# Altium PCB main.PcbDoc
Units mm, origin at the board's own origin, x right, y up, seen from the top; angles counter-clockwise.
Board outline 160 x 105 mm, 2 copper layers (Top Layer, Bottom Layer); 115 components, 173 nets, 627 pads, 0 vias.
Unrouted connection lines stored in the file: 332.
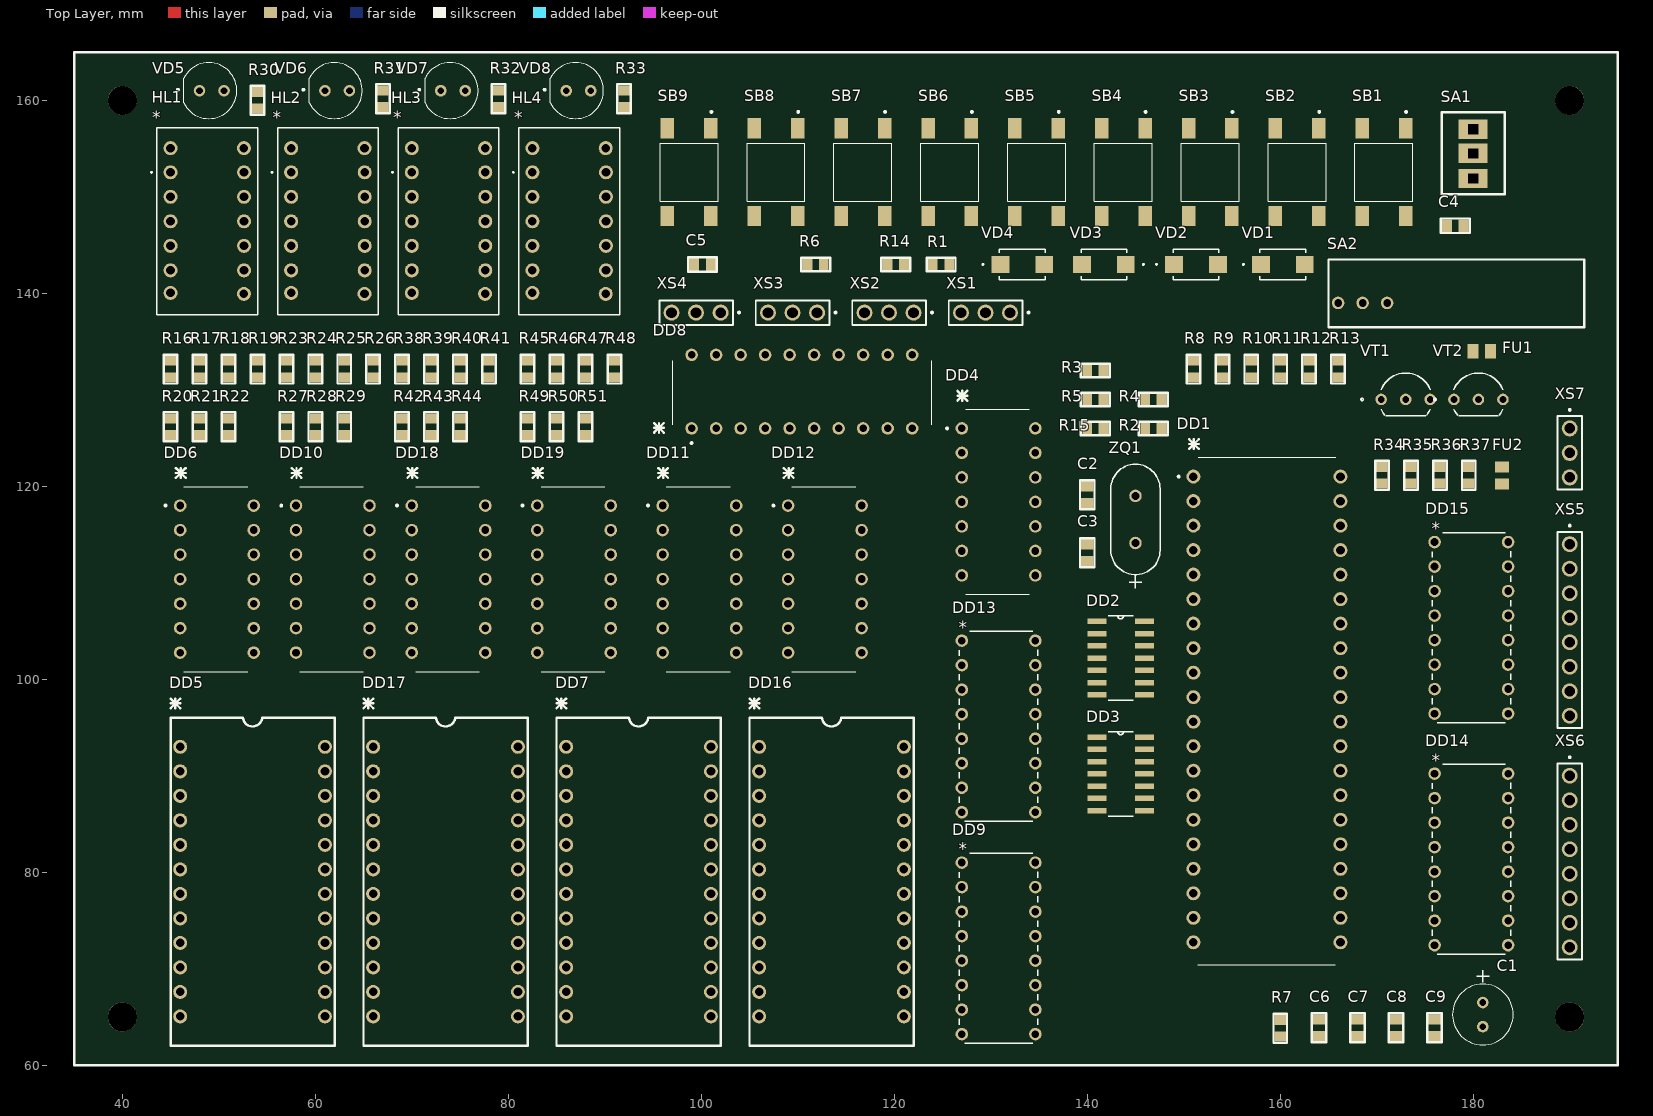
[diagram p0: Top Layer view]
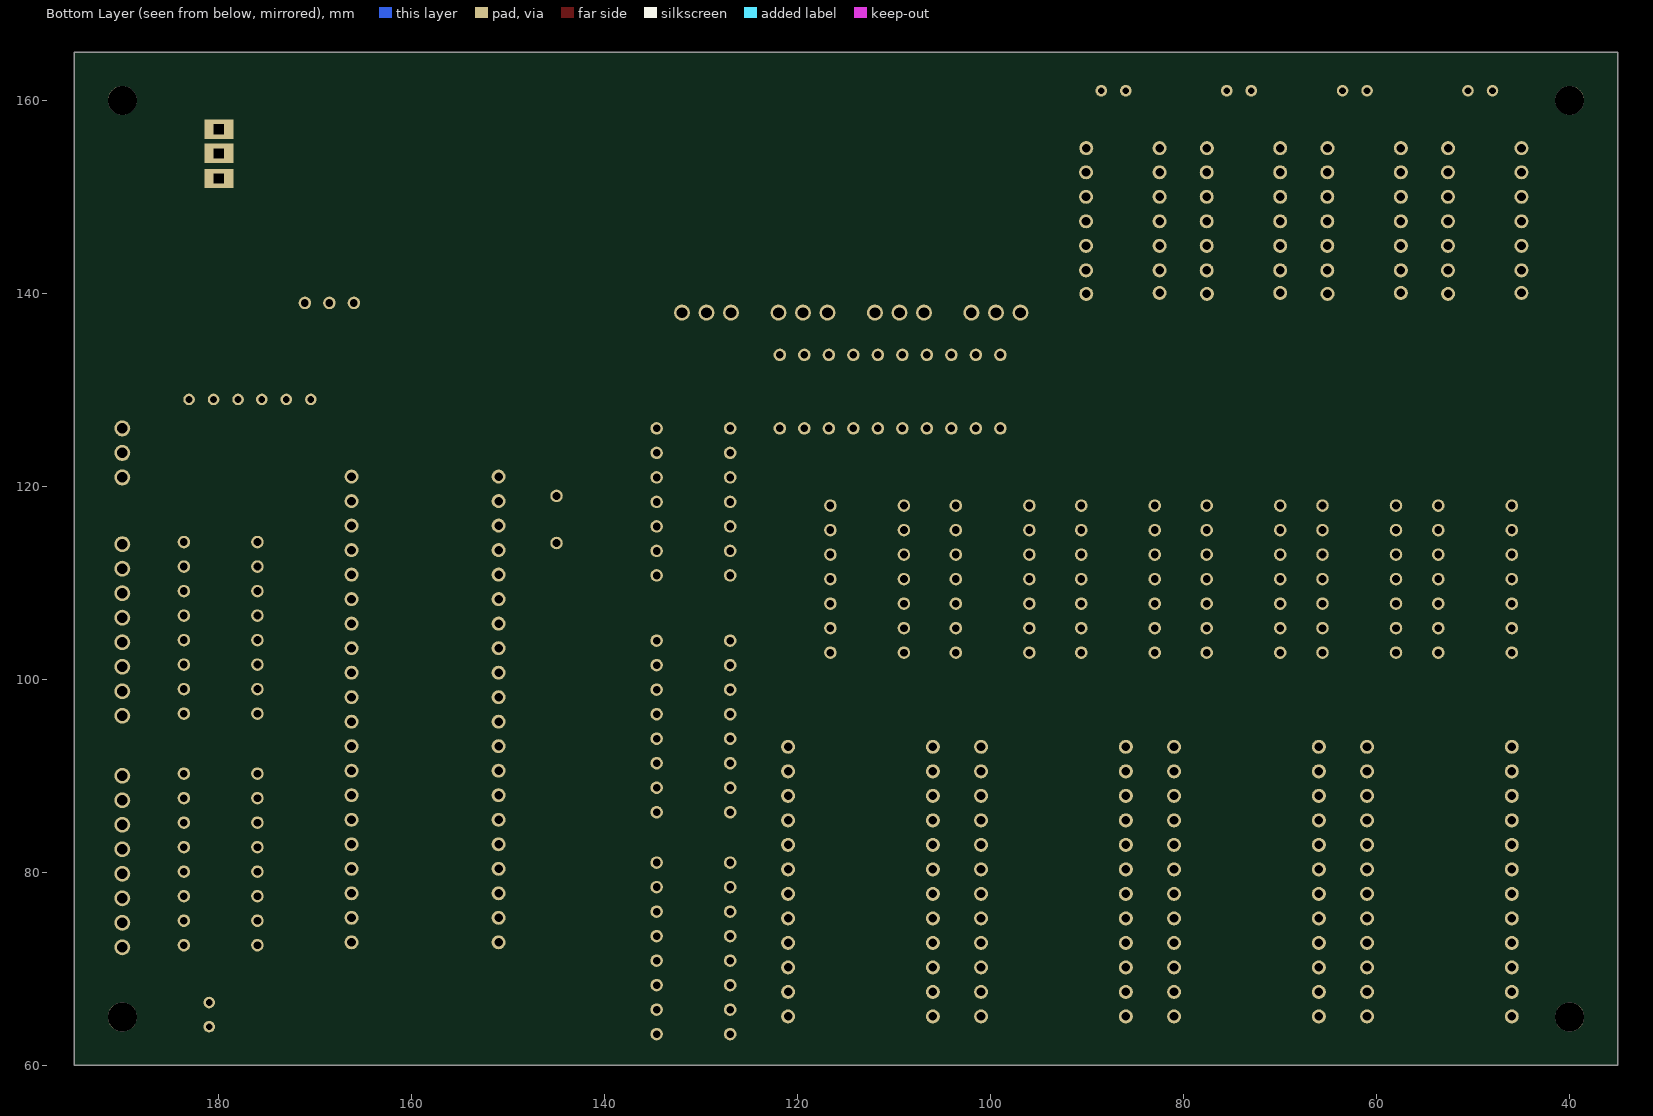
[diagram p1: Bottom Layer view, seen from below]

## Layer stack, top to bottom
Top Solder: solder mask 0.0102, Solder Resist, Dk 3.5
Top Layer: signal copper 0.0356
Dielectric 1: dielectric 0.32, FR-4, Dk 4.8
Bottom Layer: signal copper 0.0356
Bottom Solder: solder mask 0.0102, Solder Resist, Dk 3.5

## Board outline
35,60 195,60 195,165 35,165

## Design rules (kind name [scope] priority, off if disabled: settings)
Clearance [All] p1: gap=0.254 ignorepadtopadclearanceinfootprint=FALSE except(0: Arc-Hole Track-Hole SMDPad-Hole THPad-Hole Via-Hole Fill-Hole Poly-Hole Region-Hole Text-Hole)
PolygonConnect [All] p1: connectstyle=Relief reliefconductorwidth=0.254 reliefentries=4 polygonreliefangle="90 Angle" airgapwidth=0.254
RoutingVias [All] p1: holewidth=0.711 width=1.27 viastyle="Through Hole" minholewidth=0.711 minwidth=1.27 maxholewidth=0.711 maxwidth=1.27
SolderMaskExpansion [All] p1: expansion=0.102 istentingtop=FALSE
Width [All] p1: maxlimit=0.254 minlimit=0.254 preferedwidth=0.254
30 further rules are at their usual default settings.

## Classes and differential pairs
net class XS[1..4]: XS1 XS2 XS3 XS4
net class DC[1..6]: DC1 DC4 DC5 DC6
net class DB[1..8]: DB1 DB2 DB3 DB4 DB5 DB6 DB7 DB8
net class B[1..4]: B1 B2 B3 B4

## Components (designator, comment, footprint, x,y, rotation, side; value= is the part's Value field where it differs from the comment)
C1 "pol_1mkF" PCAP_6_3X11THRU-ELECT_NCA 181,64 r90 top
C2 "33pF" CAP_0805_GRM 140,119.126 r90 top
C3 "33pF" CAP_0805_GRM 140,113.126 r270 top
C4 "33pF" CAP_0805_GRM 178.126,147 r180 top
C5 "33pF" CAP_0805_GRM 100.127,143 r0 top
C6 "cap_1mkF" CAP_0805_GRM 164,63.874 r90 top
C7 "cap_1mkF" CAP_0805_GRM 168,63.874 r90 top
C8 "cap_1mkF" CAP_0805_GRM 172,63.874 r90 top
C9 "cap_1mkF" CAP_0805_GRM 176,63.874 r90 top
DD1 "KR1850VE35" DIP-40 151,121 r0 top
DD2 "K533LN1" SO-14-K533LA3 143.464,102.19 r0 top
DD3 "K533LA3" SO-14-K533LA3 143.464,90.19 r0 top
DD4 "KR1533TM2" DIP-14 127,126 r0 top
DD5 "K589IR12" DIP-24-KR556RT7 46,93 r0 top
DD6 "K514ID2" DIP-14 46,118 r0 top
DD7 "K589IR12" DIP-24-KR556RT7 86,93 r0 top
DD8 "KR580BA86" DIP-20 99,126 r90 top
DD9 "KR1533TM9" DIP-16 127,81 r0 top
DD10 "K514ID2" DIP-14 58,118 r0 top
DD11 "KR1533LA9" DIP-14 96,118 r0 top
DD12 "KR1533LA9" DIP-14 109,118 r0 top
DD13 "KR1533TM9" DIP-16 127,104 r0 top
DD14 "KR1533ID7" DIP-16 176,90.22 r0 top
DD15 "KR1533ID7" DIP-16 176,114.22 r0 top
DD16 "K556RT7" DIP-24-KR556RT7 106,93 r0 top
DD17 "K589IR12" DIP-24-KR556RT7 66,93 r0 top
DD18 "K514ID2" DIP-14 70,118 r0 top
DD19 "K514ID2" DIP-14 83,118 r0 top
FU1 "fu" FERRIT_BEAD_C2012X105N 180.89,134 r180 top
FU2 "fu" FERRIT_BEAD_C2012X105N 183,121.11 r270 top
HL1 "semisigment" LDS-C302RI_10P18X19P10_LUM 45,152.54 r0 top
HL2 "semisigment" LDS-C302RI_10P18X19P10_LUM 57.5,152.54 r0 top
HL3 "semisigment" LDS-C302RI_10P18X19P10_LUM 70,152.54 r0 top
HL4 "semisigment" LDS-C302RI_10P18X19P10_LUM 82.5,152.54 r0 top
R1 "res_510" RES_RC0805 124.848,143 r0 top
R2 "res_510" RES_RC0805 146.848,126 r0 top
R3 "res_510" RES_RC0805 140.848,132 r0 top
R4 "res_510" RES_RC0805 146.848,129 r0 top
R5 "res_510" RES_RC0805 140.848,129 r0 top
R6 "res_510" RES_RC0805 111.848,143 r0 top
R7 "res_510" RES_RC0805 160,63.848 r90 top
R8 "res_510" RES_RC0805 151,132.152 r270 top
R9 "res_510" RES_RC0805 154,132.152 r90 top
R10 "res_510" RES_RC0805 157,132.152 r270 top
R11 "res_510" RES_RC0805 160,132.152 r270 top
R12 "res_510" RES_RC0805 163,132.152 r270 top
R13 "res_510" RES_RC0805 166,132.152 r90 top
R14 "res_510" RES_RC0805 120.152,143 r0 top
R15 "res_510" RES_RC0805 140.848,126 r180 top
R16 "res_510" RES_RC0805 45,132.152 r90 top
R17 "res_510" RES_RC0805 48,132.152 r90 top
R18 "res_510" RES_RC0805 51,132.152 r90 top
R19 "res_510" RES_RC0805 54,132.152 r90 top
R20 "res_510" RES_RC0805 45,126.152 r90 top
R21 "res_510" RES_RC0805 48,126.152 r90 top
R22 "res_510" RES_RC0805 51,126.152 r90 top
R23 "res_510" RES_RC0805 57,132.152 r90 top
R24 "res_510" RES_RC0805 60,132.152 r90 top
R25 "res_510" RES_RC0805 63,132.152 r90 top
R26 "res_510" RES_RC0805 66,132.152 r90 top
R27 "res_510" RES_RC0805 57,126.152 r90 top
R28 "res_510" RES_RC0805 60,126.152 r90 top
R29 "res_510" RES_RC0805 63,126.152 r90 top
R30 "res_510" RES_RC0805 54,160 r270 top
R31 "res_510" RES_RC0805 67,160.152 r270 top
R32 "res_510" RES_RC0805 79,160.152 r270 top
R33 "res_510" RES_RC0805 92,160.152 r270 top
R34 "res_510" RES_RC0805 170.54,121.152 r90 top
R35 "res_510" RES_RC0805 173.54,121.152 r90 top
R36 "res_510" RES_RC0805 176.54,121.152 r270 top
R37 "res_510" RES_RC0805 179.54,121.152 r270 top
R38 "res_510" RES_RC0805 69,132.152 r90 top
R39 "res_510" RES_RC0805 72,132.152 r90 top
R40 "res_510" RES_RC0805 75,132.152 r90 top
R41 "res_510" RES_RC0805 78,132.152 r90 top
R42 "res_510" RES_RC0805 69,126.152 r90 top
R43 "res_510" RES_RC0805 72,126.152 r90 top
R44 "res_510" RES_RC0805 75,126.152 r90 top
R45 "res_510" RES_RC0805 82,132.152 r90 top
R46 "res_510" RES_RC0805 85,132.152 r90 top
R47 "res_510" RES_RC0805 88,132.152 r90 top
R48 "res_510" RES_RC0805 91,132.152 r90 top
R49 "res_510" RES_RC0805 82,126.152 r90 top
R50 "res_510" RES_RC0805 85,126.152 r90 top
R51 "res_510" RES_RC0805 88,126.152 r90 top
SA1 "sw-spst" SW-SPST 180,154 r0 top
SA2 "sw-spdt" SW-SPDT 166,139 r90 top
SB1 "button_keypad" BUTTON_SW_1571527-1 170.75,152.55 r270 top
SB2 "button_keypad" BUTTON_SW_1571527-1 161.75,152.55 r270 top
SB3 "button_keypad" BUTTON_SW_1571527-1 152.75,152.55 r270 top
SB4 "button_keypad" BUTTON_SW_1571527-1 143.75,152.55 r270 top
SB5 "button_keypad" BUTTON_SW_1571527-1 134.75,152.55 r270 top
SB6 "button_keypad" BUTTON_SW_1571527-1 125.75,152.55 r270 top
SB7 "button_keypad" BUTTON_SW_1571527-1 116.75,152.55 r270 top
SB8 "button_keypad" BUTTON_SW_1571527-1 107.75,152.55 r270 top
SB9 "button_keypad" BUTTON_SW_1571527-1 98.75,152.55 r270 top
VD1 "M7" M7_DO-214AC_DTC 160.27,143 r0 top
VD2 "M7" M7_DO-214AC_DTC 151.27,143 r0 top
VD3 "M7" M7_DO-214AC_DTC 141.73,143 r180 top
VD4 "M7" M7_DO-214AC_DTC 133.27,143 r0 top
VD5 "red_GNL-3012HD" LED_151054RS03000 49.27,161 r0 top
VD6 "red_GNL-3012HD" LED_151054RS03000 62.27,161 r0 top
VD7 "red_GNL-3012HD" LED_151054RS03000 74.27,161 r0 top
VD8 "red_GNL-3012HD" LED_151054RS03000 87.27,161 r0 top
VT1 "BC547" TO-92-3_ONS 170.46,129 r0 top
VT2 "trans" TO-92-3_ONS 178,129 r0 top
XS1 "switcher" CONN_3PIN_TSW-103-05-G-S 132,138 r180 top
XS2 "switcher" CONN_3PIN_TSW-103-05-G-S 122,138 r180 top
XS3 "switcher" CONN_3PIN_TSW-103-05-G-S 112,138 r180 top
XS4 "switcher" CONN_3PIN_TSW-103-05-G-S 102,138 r180 top
XS5 "conn_8pin_P" CONN_8PIN_TSW-108-05-G-S 190,114 r270 top
XS6 "conn_8_pin_G" CONN_8PIN_TSW-108-05-G-S 190,90 r270 top
XS7 "conn_3_OAK_BAK_CPH" CONN_3PIN_TSW-103-05-G-S 190,126 r270 top
ZBOAS767783366 "Comment" "BOASVIEWdrill:Таблица отверстий:0:0:0:0" 195,2117.5 r0 top
ZQ1 "HC-49S" CRYSTAL_HC49S_MTC 145,114.12 r90 top

## Footprints (in the part's own frame and the unit in brackets; to place one, negate y for a bottom-side part, rotate by r counter-clockwise, add the part's x,y. Pads: shape width x height; smd on the part's side, far side on the other; paste and mask are expansions set on the pad)
"BOASVIEWdrill:Таблица отверстий:0:0:0:0" [mm]
BUTTON_SW_1571527-1 [mm]
  rect 2.1x1.4 smd: 1(-4.55,2.25) 2(4.55,2.25) 3(-4.55,-2.25) 4(4.55,-2.25)
  silkscreen extent -6.35,-3 3,3, body extent -5,-3 5,3, height 4.36
CAP_0805_GRM [mil]
  rect 41.78x53 smd paste+0 mask+0: 1(-34.39,0) 2(34.39,0)
  silkscreen extent -59,-30 59,30, body extent -41,-26 42,27, height 53
CONN_3PIN_TSW-103-05-G-S [mm]
  round 1.65 hole 1.1: 1(0,0) 2(2.54,0) 3(5.08,0)
  silkscreen extent -2.02,-1.27 6.35,1.27, body extent -1.4,-1.27 6.35,1.27, height 5.21
CONN_8PIN_TSW-108-05-G-S [mm]
  round 1.65 hole 1.1: 1(0,0) 2(2.54,0) 3(5.08,0) 4(7.62,0) 5(10.16,0) 6(12.7,0) 7(15.24,0) 8(17.78,0)
  silkscreen extent -2.02,-1.27 19.05,1.27, body extent -1.43,-1.27 19.02,1.27, height 2.87
CRYSTAL_HC49S_MTC [mm]
  round 1.3 hole 0.8 mask+0: 1(0,0) 2(4.88,0)
  silkscreen extent -4.68,-2.55 8.17,2.55, body extent -3.43,-2.67 8.26,2.67, height 3.99
DIP-14 [mm]
  round 1.3 hole 0.8: 1(0,0) 2(0,-2.54) 3(0,-5.08) 4(0,-7.62) 5(0,-10.16) 6(0,-12.7) 7(0,-15.24) 8(7.62,-15.24) 9(7.62,-12.7) 10(7.62,-10.16) 11(7.62,-7.62) 12(7.62,-5.08) 13(7.62,-2.54) 14(7.62,0)
  silkscreen extent -1.62,-17.21 7,3.88, body extent -0.21,-17.14 7.79,1.91, height 3.71
DIP-16 [mm]
  round 1.3 hole 0.8 mask+0: 1(0,0) 2(0,-2.54) 3(0,-5.08) 4(0,-7.62) 5(0,-10.16) 6(0,-12.7) 7(0,-15.24) 8(0,-17.78) 9(7.62,-17.78) 10(7.62,-15.24) 11(7.62,-12.7) 12(7.62,-10.16) 13(7.62,-7.62) 14(7.62,-5.08) 15(7.62,-2.54) 16(7.62,0)
  silkscreen extent -0.25,-18.73 7.87,0.95, body extent -0.13,-18.61 7.86,0.83, height 4.7
DIP-20 [mm]
  round 1.3 hole 0.8: 1(0,0) 2(0,-2.54) 3(0,-5.08) 4(0,-7.62) 5(0,-10.16) 6(0,-12.7) 7(0,-15.24) 8(0,-17.78) 9(0,-20.32) 10(0,-22.86) 11(7.62,-22.86) 12(7.62,-20.32) 13(7.62,-17.78) 14(7.62,-15.24) 15(7.62,-12.7) 16(7.62,-10.16) 17(7.62,-7.62) 18(7.62,-5.08) 19(7.62,-2.54) 20(7.62,0)
  silkscreen extent -1.62,-24.9 7,3.88, body extent -0.01,-24.74 7.81,1.8, height 4.57
DIP-24-KR556RT7 [mm]
  round 1.45 hole 0.9: 1(0,0) 2(0,-2.54) 3(0,-5.08) 4(0,-7.62) 5(0,-10.16) 6(0,-12.7) 7(0,-15.24) 8(0,-17.78) 9(0,-20.32) 10(0,-22.86) 11(0,-25.4) 12(0,-27.94) 13(15,-27.94) 14(15,-25.4) 15(15,-22.86) 16(15,-20.32) 17(15,-17.78) 18(15,-15.24) 19(15,-12.7) 20(15,-10.16) 21(15,-7.62) 22(15,-5.08) 23(15,-2.54) 24(15,0)
  silkscreen extent -1,-31 16,5, body extent -0.12,-30.64 15.12,2, height 5.79
DIP-40 [mm]
  round 1.45 hole 0.9: 1(0,0) 2(0,-2.54) 3(0,-5.08) 4(0,-7.62) 5(0,-10.16) 6(0,-12.7) 7(0,-15.24) 8(0,-17.78) 9(0,-20.32) 10(0,-22.86) 11(0,-25.4) 12(0,-27.94) 13(0,-30.48) 14(0,-33.02) 15(0,-35.56) 16(0,-38.1) 17(0,-40.64) 18(0,-43.18) 19(0,-45.72) 20(0,-48.26) 21(15.24,-48.26) 22(15.24,-45.72) 23(15.24,-43.18) 24(15.24,-40.64) 25(15.24,-38.1) 26(15.24,-35.56) 27(15.24,-33.02) 28(15.24,-30.48) 29(15.24,-27.94) 30(15.24,-25.4) 31(15.24,-22.86) 32(15.24,-20.32) 33(15.24,-17.78) 34(15.24,-15.24) 35(15.24,-12.7) 36(15.24,-10.16) 37(15.24,-7.62) 38(15.24,-5.08) 39(15.24,-2.54) 40(15.24,0)
  silkscreen extent -1.62,-50.6 14.73,3.88, body extent -0.02,-50.57 15.26,2.03, height 5.79
FERRIT_BEAD_C2012X105N [mm]
  rect 1.14x1.47 smd: 1(-0.89,0) 2(0.89,0)
  body extent -1,-0.62 1,0.63, height 1.05
LDS-C302RI_10P18X19P10_LUM [mm]
  round 1.45 hole 0.9 mask+0: 1(0,2.5) 2(0,0) 3(0,-2.54) 4(0,-5.08) 5(0,-7.62) 6(0,-10.16) 7(0,-12.5) 8(7.6,-12.6) 9(7.62,-10.16) 10(7.62,-7.62) 11(7.62,-5.08) 12(7.62,-2.54) 13(7.62,0) 14(7.6,2.5)
  silkscreen extent -2.06,-14.76 9.03,4.6, body extent -0.74,-14.48 8.34,4.27, height 5.08
LED_151054RS03000 [mm]
  round 1.2 hole 0.7: 1(-1.27,0) 2(1.27,0)
  silkscreen extent -3.6,-2.9 2.6,2.9, body extent -2.56,-2.93 2.85,2.87, height 15.1
M7_DO-214AC_DTC [mm]
  rect 1.849x1.752 smd paste+0 mask+0: 1(-2.27,0) 2(2.27,0)
  silkscreen extent -4.16,-1.57 2.37,1.57, body extent -2.64,-1.4 2.64,1.4, height 2.34
PCAP_6_3X11THRU-ELECT_NCA [mm]
  round 1.2 hole 0.7: 1(0,0) 2(2.5,0)
  silkscreen extent -1.9,-3.15 5.86,3.15, body extent -1.87,-3.12 4.43,3.17, height 12.5
RES_RC0805 [mil]
  rect 39.78x47 smd paste+0 mask+0: 1(-33.39,0) 2(33.39,0)
  silkscreen extent -59,-28 59,28, body extent -39,-23 39,24, height 28
SO-14-K533LA3 [mil]
  rect 78x22 smd: 1(-97,150) 2(-97,100) 3(-97,50) 4(-97,0) 5(-97,-50) 6(-97,-100) 7(-97,-150) 8(97,-150) 9(97,-100) 10(97,-50) 11(97,0) 12(97,50) 13(97,100) 14(97,150)
  silkscreen extent -51,-172 51,172, body extent -118,-170 118,170, height 69
SW-SPDT [mm]
  round 1.3 hole 0.8: 1(0,0) 2(0,-2.54) 3(0,-5.08)
  silkscreen extent -2.5,-25.5 4.5,1, body extent -2.02,-25.22 3.82,0.3, height 10.2
SW-SPST [mm]
  rect 3x2 hole 1 square: 1(0,3) 2(0,-2.1) ""(0,0.5)
  silkscreen extent -3.25,-3.75 3.25,4.75, body extent -3,-3.6 3,4.5, height 18.15
TO-92-3_ONS [mm]
  round 1.2 hole 0.7 mask+0: 1(0,0) 2(2.54,0) 3(5.08,0)
  silkscreen extent -2.1,-1.71 5.08,2.73, body extent -0.32,-1.07 5.32,2.61, height 5.8

## Part data
C1: library part cap_pol_10mkF_15v
C2 C3 C4 C5: library part cap_33pF
VD1 VD2 VD3 VD4: library part diode_M7
VD5 VD6 VD7 VD8: library part diode_red
VT1: library part trans_BC547
ZQ1: library part crystal_8mhz

## Free pads (board coordinates)
  round 3 hole 3 unplated: ""(40,65) ""(40,160) ""(190,65) ""(190,160)

## Nets (pads, with @x,y where several pads share a name; then routed paths per layer and width w, separated by ;. In a path a pad name is that pad's centre, name@x,y a point inside that pad or via, vN(x,y) a via of type N, cw(c..) or ccw(c..) an arc to the next point about the centre after c; other vN are vias at no path point)
B1: DD1.38 R10.1 SB2.2 VD1.2
B2: DD1.37 R11.1 SB3.2 VD2.2
B3: DD1.36 R12.1 SB4.2 VD3.2
B4: DD1.35 R13.1 SB5.2 VD4.2
DB1: DD1.12 DD5.3 DD7.3 DD8.1 DD13.3 DD16.9 DD17.3
DB2: DD1.13 DD5.5 DD7.5 DD8.2 DD13.4 DD16.10 DD17.5
DB3: DD1.14 DD5.7 DD7.7 DD8.3 DD13.6 DD16.11 DD17.7
DB4: DD1.15 DD5.9 DD7.9 DD8.4 DD13.11 DD16.13 DD17.9
DB5: DD1.16 DD5.16 DD7.16 DD8.5 DD13.13 DD16.14 DD17.16
DB6: DD1.17 DD5.18 DD7.18 DD8.6 DD13.14 DD16.15 DD17.18
DB7: DD1.18 DD5.20 DD7.20 DD8.7 DD9.3 DD16.16 DD17.20
DB8: DD1.19 DD5.22 DD7.22 DD8.8 DD9.4 DD16.17 DD17.22
DB9: DD1.8 DD2.1
DB10: DD1.10 DD2.11
DB11: DD3.5 DD3.10 DD13.2 DD16.8
DB12: DD7.13 DD13.5 DD16.7
DB13: DD13.7 DD16.6
DB14: DD5.13 DD13.10 DD16.5 DD17.13
DB15: DD13.12 DD16.4
DB16: DD13.15 DD16.3
DB17: DD9.2 DD16.2
DB18: DD9.5 DD16.1
DB19: DD9.7 DD16.23
DB20: DD9.10 DD16.22
DB21: DD9.12 DD16.21
DB22: DD2.8 DD5.1 DD7.1 DD17.1
DC1: DD1.7 DD1.27 DD1.28 DD1.29 DD4.1 DD4.13 DD5.2 DD7.2 DD14.6 DD15.1 DD15.2 DD15.3 DD15.6 DD16.19 DD17.2 R7.2
DC4: DD1.30 DD14.1
DC5: DD1.31 DD14.2
DC6: DD1.32 DD14.3
GND: C1.1 C2.1 C3.1 C4.1 C5.1 C6.1 C7.1 C8.1 C9.1 DD4.2 DD4.12 DD5.11 DD7.11 DD8.11 DD16.20 DD17.11 R35.2 SA1.1 SA2.1 SB1.1 SB2.1 SB3.1 SB4.1 SB5.1 SB6.1 SB7.1 SB8.1 SB9.1 VT1.1 XS1.1 XS2.1 XS3.1 XS4.1
KT: DD7.6 DD18.4 DD19.4
NEG3: DD1.9 DD2.3
NEG4: DD2.4 DD16.18
NEG6: DD2.6 DD12.2
NEG12: DD2.12 DD9.9 DD13.9
NEG13: DD1.39 DD2.13
NetC2_2: C2.2 DD1.2 ZQ1.2
NetC3_2: C3.2 DD1.3 ZQ1.1
NetC4_2: C4.2 DD1.4 DD5.14 DD7.14 DD9.1 DD13.1 DD17.14 R8.1 SB1.2
NetC5_2: C5.2 DD4.4 R5.1 SB9.2
NetDD1_1: DD1.1 R4.2
NetDD1_5: DD1.5 R1.2
NetDD1_6: DD1.6 R2.2
NetDD1_21: DD1.21 DD9.6
NetDD1_22: DD1.22 DD9.11
NetDD1_23: DD1.23 DD9.13
NetDD1_24: DD1.24 DD9.14
NetDD2_2: DD2.2 DD3.9
NetDD2_9: DD2.9 DD2.10 DD3.4
NetDD3_6: DD3.6 DD4.3
NetDD3_8: DD3.8 DD8.9
NetDD4_6: DD4.6 DD6.4 DD8.16 DD10.4
NetDD4_9: DD4.9 DD12.9
NetDD4_10: DD4.10 R15.2 SA1.2
NetDD4_11: DD4.11 DD11.11 DD12.10 VD7.2
NetDD5_4: DD5.4 DD6.7
NetDD5_6: DD5.6 DD6.1
NetDD5_8: DD5.8 DD6.2
NetDD5_10: DD5.10 DD6.6
NetDD5_15: DD5.15 DD10.7
NetDD5_17: DD5.17 DD10.1
NetDD5_19: DD5.19 DD10.2
NetDD5_21: DD5.21 DD10.6
NetDD6_9: DD6.9 R22.1
NetDD6_10: DD6.10 R21.1
NetDD6_11: DD6.11 R20.1
NetDD6_12: DD6.12 R19.1
NetDD6_13: DD6.13 R18.1
NetDD6_14: DD6.14 R17.1
NetDD6_15: R16.1
NetDD7_4: DD7.4 DD14.4 DD14.5 DD15.4 DD15.5
NetDD7_8: DD7.8 DD11.1 DD11.2
NetDD7_10: DD7.10 DD11.4 DD11.5
NetDD7_15: DD7.15 DD11.12 DD11.13 DD12.1
NetDD7_17: DD7.17 DD11.6 R34.1 VD5.2
NetDD8_17: DD8.17 R6.1 SB8.2
NetDD8_18: DD8.18 R14.1 SB7.2
NetDD8_19: DD8.19 R9.1 SB6.2 VD1.1 VD2.1 VD3.1 VD4.1
NetDD10_9: DD10.9 R29.1
NetDD10_10: DD10.10 R28.1
NetDD10_11: DD10.11 R27.1
NetDD10_12: DD10.12 R26.1
NetDD10_13: DD10.13 R25.1
NetDD10_14: DD10.14 R24.1
NetDD10_15: R23.1
NetDD11_3: DD11.3 VD6.2
NetDD12_3: DD12.3 VD8.2
NetDD12_8: DD12.8 XS7.3
NetDD14_7: DD14.7 XS6.8
NetDD14_9: DD14.9 XS6.7
NetDD14_10: DD14.10 XS6.6
NetDD14_11: DD14.11 XS6.5
NetDD14_12: DD14.12 XS6.4
NetDD14_13: DD14.13 XS6.3
NetDD14_14: DD14.14 XS6.2
NetDD14_15: DD14.15 XS6.1
NetDD15_7: DD15.7 XS5.8
NetDD15_9: DD15.9 XS5.7
NetDD15_10: DD15.10 XS5.6
NetDD15_11: DD15.11 XS5.5
NetDD15_12: DD15.12 XS5.4
NetDD15_13: DD15.13 XS5.3
NetDD15_14: DD15.14 XS5.2
NetDD15_15: DD15.15 XS5.1
NetDD17_4: DD17.4 DD18.7
NetDD17_6: DD17.6 DD18.1
NetDD17_8: DD17.8 DD18.2
NetDD17_10: DD17.10 DD18.6
NetDD17_15: DD17.15 DD19.7
NetDD17_17: DD17.17 DD19.1
NetDD17_19: DD17.19 DD19.2
NetDD17_21: DD17.21 DD19.6
NetDD18_9: DD18.9 R44.1
NetDD18_10: DD18.10 R43.1
NetDD18_11: DD18.11 R42.1
NetDD18_12: DD18.12 R41.1
NetDD18_13: DD18.13 R40.1
NetDD18_14: DD18.14 R39.1
NetDD18_15: R38.1
NetDD19_9: DD19.9 R51.1
NetDD19_10: DD19.10 R50.1
NetDD19_11: DD19.11 R49.1
NetDD19_12: DD19.12 R48.1
NetDD19_13: DD19.13 R47.1
NetDD19_14: DD19.14 R46.1
NetDD19_15: R45.1
NetFU1_1: FU1.1 R37.2 VT2.3
NetFU1_2: FU1.2 SA2.3
NetFU2_1: FU2.1 VT2.1
NetFU2_2: FU2.2 XS7.2
NetHL1_1: HL1.1 R18.2
NetHL1_2: HL1.2 R19.2
NetHL1_7: HL1.7 R20.2
NetHL1_8: HL1.8 R21.2
NetHL1_10: HL1.10 R22.2
NetHL1_11: HL1.11 R16.2
NetHL1_13: HL1.13 R17.2
NetHL2_1: HL2.1 R25.2
NetHL2_2: HL2.2 R26.2
NetHL2_7: HL2.7 R27.2
NetHL2_8: HL2.8 R28.2
NetHL2_10: HL2.10 R29.2
NetHL2_11: HL2.11 R23.2
NetHL2_13: HL2.13 R24.2
NetHL3_1: HL3.1 R40.2
NetHL3_2: HL3.2 R41.2
NetHL3_7: HL3.7 R42.2
NetHL3_8: HL3.8 R43.2
NetHL3_10: HL3.10 R44.2
NetHL3_11: HL3.11 R38.2
NetHL3_13: HL3.13 R39.2
NetHL4_1: HL4.1 R47.2
NetHL4_2: HL4.2 R48.2
NetHL4_7: HL4.7 R49.2
NetHL4_8: HL4.8 R50.2
NetHL4_10: HL4.10 R51.2
NetHL4_11: HL4.11 R45.2
NetHL4_13: HL4.13 R46.2
NetR3_1: R3.1 XS1.2 XS2.2 XS3.2 XS4.2
NetR30_1: R30.1 VD5.1
NetR31_1: R31.1 VD6.1
NetR32_1: R32.1 VD7.1
NetR33_1: R33.1 VD8.1
NetR34_2: R34.2 R35.1 VT1.2
NetR36_1: R36.1 VT1.3
NetR36_2: R36.2 R37.1 VT2.2
NetSA2_2: SA2.2 XS7.1
XS1: DD8.15 XS1.3
XS2: DD8.14 XS2.3
XS3: DD8.13 XS3.3
XS4: DD8.12 XS4.3
Y: C1.2 C6.2 C7.2 C8.2 C9.2 R1.1 R2.1 R3.2 R4.1 R5.2 R6.2 R7.1 R8.2 R9.2 R10.2 R11.2 R12.2 R13.2 R14.2 R15.1 R30.2 R31.2 R32.2 R33.2
pads on no net: DD1.11 DD1.20 DD1.25 DD1.26 DD1.33 DD1.34 DD1.40 DD2.5 DD2.7 DD2.14 DD3.1 DD3.2 DD3.3 DD3.7 DD3.11 DD3.12 DD3.13 DD3.14 DD4.5 DD4.7 DD4.8 DD4.14 DD5.12 DD5.23 DD5.24 DD6.3 DD6.5 DD6.8 DD7.12 DD7.19 DD7.21 DD7.23 DD7.24 DD8.10 DD8.20 DD9.8 DD9.15 DD9.16 DD10.3 DD10.5 DD10.8 DD11.7 DD11.8 DD11.9 DD11.10 DD11.14 DD12.4 DD12.5 DD12.6 DD12.7 DD12.11 DD12.12 DD12.13 DD12.14 DD13.8 DD13.16 DD14.8 DD14.16 DD15.8 DD15.16 DD16.12 DD16.24 DD17.12 DD17.23 DD17.24 DD18.3 DD18.5 DD18.8 DD19.3 DD19.5 DD19.8 HL1.3 HL1.4 HL1.5 HL1.6 HL1.9 HL1.12 HL1.14 HL2.3 HL2.4 HL2.5 HL2.6 HL2.9 HL2.12 HL2.14 HL3.3 HL3.4 HL3.5 HL3.6 HL3.9 HL3.12 HL3.14 HL4.3 HL4.4 HL4.5 HL4.6 HL4.9 HL4.12 HL4.14 SA1. SB1.3 SB1.4 SB2.3 SB2.4 SB3.3 SB3.4 SB4.3 SB4.4 SB5.3 SB5.4 SB6.3 SB6.4 SB7.3 SB7.4 SB8.3 SB8.4 SB9.3 SB9.4

## Silkscreen, mask and mechanical layers (free items; w line width, h text height)
Top Overlay:
  lines w0.25: 35,60 35,165 195,165 195,162 195,60 40,60 35,60
Mechanical 7:
  text "BOASFORMAT|А1|1|0|766141733|331102362|1000000000|1:1|" at 0,2540 h0
  text "SET2|Superlayer=MechanicalLayer7|Wsuperlayer=MechanicalLayer8|Layergrid=MechanicalLayer9|Werase=MechanicalLayer11|Layermark=MechanicalLayer12|Layerstamp=MechanicalLayer13|Thinline=0,18|Basicline=0,6|Gridline=0,18|Boardline=0,6|Contourpolygonline=0,6|PcbGridStep=1|PcbGridCleareanceAtView=0|PcbGridNumberEach=l4|PcbGridLineEach=l2|PcbGridCountSecondaryStrip=1|PcbGridEnabledStrip=True|PcbSignalGridEnabled=True|PcbSignalShowBukva=True|RealSignalLayerNames=False|PcbGridEnabledBothSide=False|PcbPolarGridEnabled=False|PcbPolarGridAngleStep=10|PcbPolarGridRadialStep=10|PcbPolarGridCenterPcbGrid=False|SilkShowPad=True|SilkViewName=Слой маркировки|SilkShowHole=True|SilkShowAxis=True|SilkShowBukva=True|SilkShowGrid=False|SolderShowGrid=False|SolderViewName=Слой маски|SolderShowAxis=False|SolderShowBukva=False|MainViewShowGrid=False|MainViewUseShapesDrill=False|ShowBukvaOnSboky=True|Density=2,2|TableName=Таблица 1|RazrezWidth=100|RealLayerNames=False|RazrezShowBukva=False|RazrezBukva=В-В|Sher=Rz 160|Asstoplayer=MechanicalLayer1|Asstoplayer2=None|Assbottomlayer=MechanicalLayer2|Assbottomlayer2=None|AssMinDiameterHoles=2|AssDim=False|AssMech=False|AssSilk=False|AssComponentSilk=False|AssFreeSilk=False|AssSmdPads=False|AssGridEnable=False|Mirror=Horisontal|PcbGridFontSize=5|PcbGridCenterZero=False|TTStampDistance=12|MainFontSize=5|PolyShtrihEnable=True|PolyStep=2|PcbDrillDrawingGridEnabled=False|PcbDrillDrawingViewName=Слой сверловки|PcbDrillDrawingShowBukva=False|PcbDrillDrawingShowAxis=False|PcbSignalLayersUseDrill=False|PcbSignalLayersUseShapesDrill=False|PcbSignalLayersShowAxis=False" at 0,0.025 h0
  text "BOASVIADRILLTABLE:" at 0,0 h0
  text "2BOASDRILLTABLE:none,275591,Да,16,True,|none,314961,Да,187,True,|none,354331,Да,192,True,|none,393701,Да,3,True,|none,433071,Да,31,True,|none,1181102,Нет,4,True," at 0,0 h0
Mechanical 13:
  lines w0.18: 651,1956 716,1956 ; 651,1961 716,1961 ; 651,1966 716,1966 ; 651,1971 716,1971 ; 651,1976 716,1976 ; 651,1991 716,1991 ; 651,1996 716,1996 ; 651,2001 716,2001 ; 790.96,1971 790.96,1986 ; 795.98,1971 795.98,1986 ; 812.7,2522.1 815.8,2516.7 821.4,2526.5
  lines w0.6: 8,1976 20,1976 ; 8,2011 20,2011 ; 8,2036 20,2036 ; 8,2061 20,2061 ; 8,2178 20,2178 ; 13,1951 13,2096 ; 13,2118 13,2238 ; 20,2096 8,2096 8,1951 20,1951 ; 20,2118 8,2118 8,2238 20,2238 ; 20,2521 90,2521 90,2535 ; 651,1951 651,2006 836,2006 ; 651,1981 716,1981 ; 651,1986 716,1986 ; 658,1981 658,2006 ; 668,1951 668,2006 ; 691,1951 691,2006 ; 706,1951 706,2006 ; 716,1951 716,2006 836,2006 ; 716,1966 786,1966 836,1966 ; 716,1991 836,1991 ; 765,2524 770,2515 777.6,2529 ; 777.7,2529 828,2529 ; 786,1951 786,1991 ; 786,1971 836,1971 ; 786,1986 801,1986 836,1986 ; 801,1971 801,1991 ; 806.57,1966 806.57,1971 ; 818,1971 818,1991 ; 836,2014 836,2006 ; 20,1951 836,1951 836,2535 20,2535 20,1951
  text "Rz 160" at 777.7,2516.7 h10.75
  text "(" at 809,2516.7 h10.75
  text ")" at 820,2516.7 h10.75
  text "Перв. примен." at 12.251,2195.478 h5.38 r90
  text "Справ. №" at 12.251,2139.457 h5.38 r90
  text "Подп. и дата" at 12.251,2066.976 h5.38 r90
  text "Инв. № дубл." at 12.251,2037.603 h5.38 r90
  text "Взам. инв. №" at 12.251,2012.547 h5.38 r90
  text "Лит." at 789.741,1986.749 h5.38
  text "Масса" at 804.229,1986.749 h5.38
  text "Масштаб" at 818.813,1986.749 h5.38
  text "Подп. и дата" at 12.251,1983.476 h5.38 r90
  text "Изм." at 651.171,1981.749 h5.38
  text "Лист" at 658.285,1981.749 h5.38
  text "№ докум." at 671.982,1981.749 h5.38
  text "Подп." at 694.239,1981.749 h5.38
  text "Дата" at 706.188,1981.749 h5.38
  text "Разраб." at 651.533,1976.771 h5.38
  text "15 г" at 804.907,1975.999 h7.68
  text "1:1" at 824.421,1975.999 h7.68
  text "Пров." at 651.533,1971.771 h5.38
  text "Т.контр." at 651.533,1966.771 h5.38
  text "Лист" at 787.442,1966.771 h5.38
  text "Листов" at 808.485,1966.771 h5.38
  text "1" at 828.312,1966.771 h5.38
  text "Н.контр." at 651.533,1956.771 h5.38
  text "Инв. № подл." at 12.251,1952.603 h5.38 r90
  text "Утв." at 651.533,1951.771 h5.38
  text "Копировал" at 726.533,1946.771 h5.38
  text "Формат А1" at 806.059,1946.771 h5.38

## Text inside footprints (layer, text, board x,y; h text height)
DD9: Top Overlay "*" at 126.682,81.787 h1.27
DD13: Top Overlay "*" at 126.682,104.787 h1.27
DD14: Top Overlay "*" at 175.683,91.007 h1.27
DD15: Top Overlay "*" at 175.683,115.007 h1.27
HL1: Top Overlay "*" at 43.1,157.64 h1.27
HL2: Top Overlay "*" at 55.6,157.64 h1.27
HL3: Top Overlay "*" at 68.1,157.64 h1.27
HL4: Top Overlay "*" at 80.6,157.64 h1.27
ZBOAS767783366: Mechanical 12 "-" at 289.884,2055.296 h7.68; Mechanical 12 "Нет" at 325.812,2055.296 h7.68; Mechanical 12 "3" at 250.347,2055.296 h7.68; Mechanical 12 "4" at 359.33,2055.296 h7.68; Mechanical 12 "1,7" at 288.017,2063.999 h7.68; Mechanical 12 "Да" at 327.462,2063.999 h7.68; Mechanical 12 "1,1" at 249.409,2063.999 h7.68; Mechanical 12 "31" at 357.647,2063.999 h7.68; Mechanical 12 "2,0" at 287.084,2071.999 h7.68; Mechanical 12 "Да" at 327.462,2071.999 h7.68; Mechanical 12 "1" at 251.018,2071.999 h7.68; Mechanical 12 "3" at 358.94,2071.999 h7.68; Mechanical 12 "1,5" at 288.201,2079.999 h7.68; Mechanical 12 "Да" at 327.462,2079.999 h7.68; Mechanical 12 "0,9" at 248.056,2079.999 h7.68; Mechanical 12 "192" at 356.537,2079.999 h7.68; Mechanical 12 "1,3" at 288.418,2087.999 h7.68; Mechanical 12 "Да" at 327.462,2087.999 h7.68; Mechanical 12 "0,8" at 248.146,2087.999 h7.68; Mechanical 12 "187" at 356.395,2087.999 h7.68; Mechanical 12 "1,2" at 288.16,2095.999 h7.68; Mechanical 12 "Да" at 327.462,2095.999 h7.68; Mechanical 12 "0,7" at 247.932,2095.999 h7.68; Mechanical 12 "16" at 358.367,2095.999 h7.68; Mechanical 12 "отв." at 355.66,2103.749 h7.68; Mechanical 12 "Кол." at 355.922,2111.249 h7.68; Mechanical 12 "металлизации" at 312.788,2103.749 h7.68; Mechanical 12 "Наличие" at 320.638,2111.249 h7.68; Mechanical 12 "площадки, мм" at 273.977,2103.749 h7.68; Mechanical 12 "Диаметр конт." at 272.5,2111.249 h7.68; Mechanical 12 "мм" at 248.585,2103.749 h7.68; Mechanical 12 "Диаметр отв.," at 234.252,2111.249 h7.68; Mechanical 12 "отв." at 209.066,2103.749 h7.68; Mechanical 12 "Обозначение" at 198.202,2111.249 h7.68; Mechanical 12 "Таблица 1" at 195,2119 h7.68